# Altium PCB DE-110817.PcbDoc (part 2 of 2)
Units mil, origin at the board's own origin, x right, y up, seen from the top; angles counter-clockwise.
Board outline 3742.01 x 2935 mil, 2 copper layers (Top Layer, Bottom Layer); 204 components, 127 nets, 615 pads, 148 vias.
Unrouted connection lines stored in the file: 4.
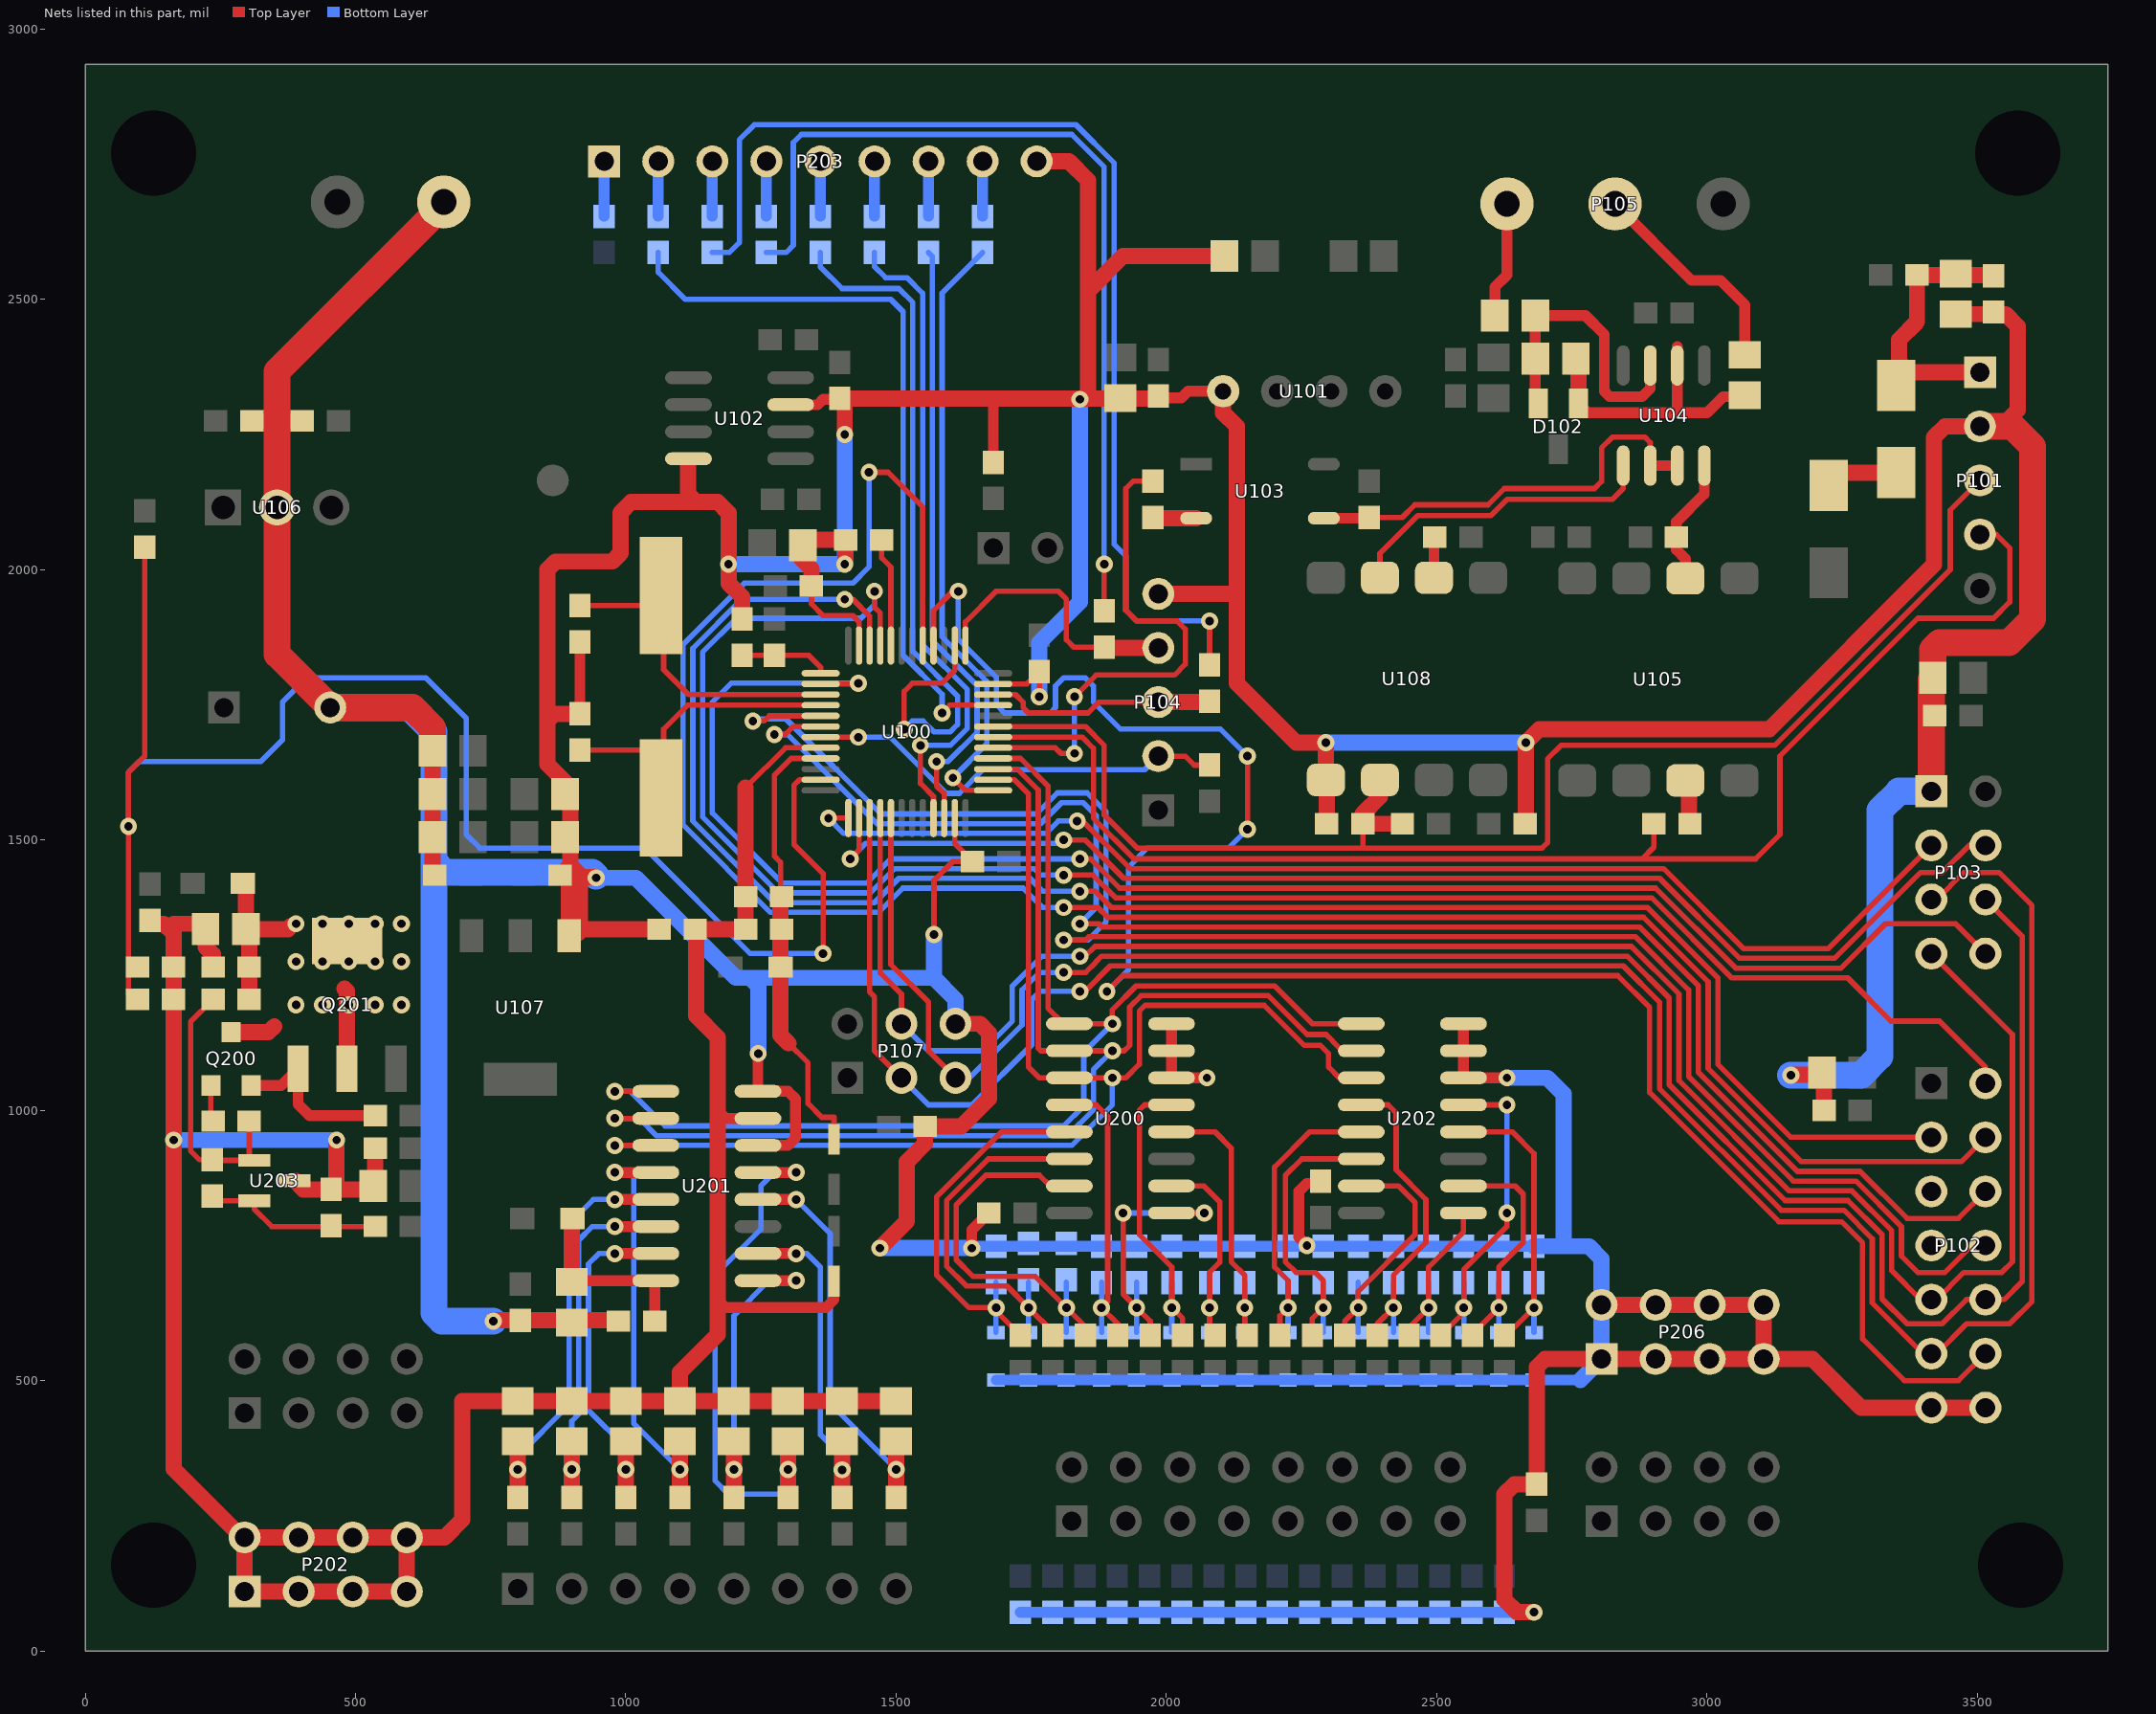
[diagram p2: the nets of this part, all layers, seen from the top]

## Via types
v1: diameter 31.5, hole 15.75, Top Layer to Bottom Layer, 148 vias

## Nets (pads, with @x,y where several pads share a name; then routed paths per layer and width w, separated by ;. In a path a pad name is that pad's centre, name@x,y a point inside that pad or via, vN(x,y) a via of type N, cw(c..) or ccw(c..) an arc to the next point about the centre after c; other vN are vias at no path point) (continued)
LED_1: R248.2 U100.33 | length 1391.9
  Top Layer w10: v1(1585,1735) 1599.21,1749.21 U100.33@1679.45,1749.21
  Bottom Layer w10: R248.2@1060,2586.54 1060,2550 1110,2500 1490,2500 1513,2477 1513,1841.54 1585,1769.54 v1(1585,1735)
LED_2: R104.2 R249.2 | length 2062.9
  Top Layer w10: R104.2@2080,1823.46 v1(2080,1905)
  Bottom Layer w10: R249.2@1160,2586.54 1191.54,2586.54 1210,2605 1210,2795 1238,2823 1832.46,2823 1903,2752.46 1903,2047 1925,2025 1925,1925 1945,1905 v1(2080,1905)
LED_3: R105.2 R250.2 | length 1673.2
  Top Layer w10: R105.2@1885,1923.46 v1(1885,2010)
  Bottom Layer w10: R250.2@1260,2586.54 1296.54,2586.54 1310,2600 1310,2790 1325,2805 1825,2805 1885,2745 v1(1885,2010)
LED_4: R251.2 U100.38 | length 1383.8
  Top Layer w10: v1(1515,1705) 1515,1775 1530,1790 1585,1790 1608.58,1813.58 U100.38@1608.58,1859.45
  Bottom Layer w10: R251.2@1360,2586.54 1360,2560 1400,2520 1505,2520 1531,2494 1531,1849 1613.75,1766.25 1613.75,1713.75 1600,1700 1570,1700 1550,1720 1530,1720 v1(1515,1705)
LED_5: R252.2 U100.21 | length 1218.7
  Top Layer w10: v1(1545,1675) 1545,1604.54 1569.21,1580.33 U100.21@1569.21,1540.55
  Bottom Layer w10: R252.2@1460,2586.54 1460,2560.46 1480.46,2540 1520,2540 1549,2511 1549,1861 1631.75,1778.25 1631.75,1706.29 1600.46,1675 v1(1545,1675)
LED_6: R253.2 U100.22 | length 1132.1
  Top Layer w10: v1(1575,1645) 1575,1600 1588.9,1586.1 U100.22@1588.9,1540.55
  Bottom Layer w10: R253.2@1560,2586.54 1567,2579.54 1567,1868.46 1649.75,1785.71 1649.75,1698.84 1595.91,1645 v1(1575,1645)
LED_7: R254.2 U100.25 | length 1147
  Top Layer w10: v1(1605,1615) 1628.27,1591.73 U100.25@1679.45,1591.73
  Bottom Layer w10: v1(1605,1615) 1667.75,1677.75 1667.75,1793.16 1585,1875.91 1585,2511.54 R254.2@1660,2586.54
MUX_A: U100.26 U200.11 U201.11 U202.11 | length 2465.2
  Top Layer w10: v1(980,935) U201.11@1055.51,935 ; U100.26@1679.45,1611.42 1718.58,1611.42 1745,1585 1745,1080 1765,1060 U200.11@1820.51,1060 v1(1900,1060) 1925,1060 1950,1085 1950,1183.43 1960.57,1194 2181,1194 2255,1120 2285,1120 2300,1105 2300,1080 2320,1060 U202.11@2360.51,1060
  Bottom Layer w10: v1(980,935) 1825,935 1900,1010 v1(1900,1060)
MUX_B: U100.27 U200.10 U201.10 U202.10 | length 2420.4
  Top Layer w10: v1(980,985) U201.10@1055.51,985 ; U100.27@1679.45,1631.1 1724.35,1631.1 1763,1592.46 1763,1115 1768,1110 U200.10@1820.51,1110 v1(1900,1110) 1922,1110 1932,1120 1932,1190.89 1953.11,1212 2188.46,1212 2260.46,1140 2295.46,1140 2308,1127.46 2308,1127 2325,1110 U202.10@2360.51,1110
  Bottom Layer w10: v1(980,985) 1025,985 1057,953 1817.54,953 1865,1000.46 1865,1075 v1(1900,1110)
MUX_C: U100.28 U200.9 U201.9 U202.9 | length 2356.6
  Top Layer w10: v1(980,1035) U201.9@1055.51,1035 ; U100.28@1679.45,1650.79 1730.12,1650.79 1781,1599.91 1781,1189 1810,1160 U200.9@1820.51,1160 v1(1900,1160) 1900,1185.91 1944.09,1230 2200,1230 2270,1160 U202.9@2360.51,1160
  Bottom Layer w10: v1(980,1035) 1008.46,1035 1072.46,971 1810.09,971 1847,1007.91 1847,1107 v1(1900,1160)
NetC100_1: C100.1 C101.1 D100.2 P101.1 R100.1 | length 474.7
  Top Layer w30: P101.1@3505,2365 3374.29,2365 3355,2384.29 3355,2425 3388.46,2458.46 R100.1@3388.46,2545 3528.46,2545 C101.1@3530,2543.46
NetC106_2: C106.2 U100.5 Y100.1 | length 608.6
  Top Layer w10: C106.2@915,1933.46 Y100.1@1056.91,1933.46 ; Y100.1@1070,1972.01 1070,1815 1116.1,1768.9 1360.55,1768.9
NetC107_2: C107.2 U100.6 Y100.2 | length 545.9
  Top Layer w10: C107.2@915,1666.54 Y100.2@1045,1666.54 ; Y100.2@1070,1597.99 1070,1705 1114.21,1749.21 1360.55,1749.21
NetC108_1: C108.1 R108.1 U100.1 | length 165.9
  Top Layer w10: C108.1@1215,1841.54 R108.1@1275,1841.54 1338.46,1841.54 1360.55,1819.45 U100.1@1360.55,1808.27
NetC200_2: C200.2 D200.1 R204.2 U200.13 | length 737.9
  Top Layer w10: R204.2@1730,583.46 1685,628.46 v1(1685,635) 1635,635 1575,695 1575,840 1695,960 U200.13@1820.51,960
  Bottom Layer w10: D200.1@1685,588.9 v1(1685,635) C200.2@1685,681.54
NetC201_2: C201.2 D201.1 R205.2 U200.14 | length 726.6
  Top Layer w10: R205.2@1790,583.46 1790,590 v1(1745,635) 1705,675 1630,675 1593.25,711.75 1593.25,832.8 1670.46,910 U200.14@1820.51,910
  Bottom Layer w10: D201.1@1745,588.9 v1(1745,635) C201.2@1745,681.54
NetC202_2: C202.2 D202.1 R207.2 U200.15 | length 740.9
  Top Layer w10: U200.15@1820.51,860 1785,860 1765,880 1666,880 1611.25,825.25 1611.25,723.75 1642,693 1757,693 v1(1815,635) 1850,600 R207.2@1850,583.46
  Bottom Layer w10: D202.1@1815,588.9 v1(1815,635) C202.2@1815,681.54
NetC203_2: C203.2 D203.1 R209.2 U200.12 | length 594.6
  Top Layer w10: U200.12@1820.51,1010 1870,1010 1891.25,988.75 1891.25,646.25 v1(1880,635) 1910,605 R209.2@1910,583.46
  Bottom Layer w10: D203.1@1880,588.9 v1(1880,635) C203.2@1880,681.54
NetC205_2: C205.2 C207.2 L200.2 U201.16 | length 350.6
  Top Layer w20: C205.2@900,682.4 902.6,685 U201.16@1055.51,685 1053.46,682.95 C207.2@1053.46,610
  Top Layer w30: C205.2@900,682.4 900,798.74 L200.2@901.26,800
NetC208_2: C208.2 R212.1 U201.12 | length 793.5
  Top Layer w20: v1(980,885) U201.12@1055.51,885
  Top Layer w30: R212.1@1100,283.46 v1(1100,335.53) C208.2@1100,387.6
  Bottom Layer w10: v1(980,885) 1005,885 1015,875 1015,420.53 v1(1100,335.53)
NetC209_2: C209.2 R210.1 U201.15 | length 645.6
  Top Layer w20: v1(980,735) U201.15@1055.51,735
  Top Layer w30: R210.1@1000,283.46 v1(1000,335.53) C209.2@1000,387.6
  Bottom Layer w10: v1(980,735) 950,735 931,716 931,445 1000,376 v1(1000,335.53)
NetC210_2: C210.2 R208.1 U201.14 | length 686.9
  Top Layer w20: v1(980,785) U201.14@1055.51,785
  Top Layer w30: R208.1@900,283.46 v1(900,335.53) C210.2@900,387.6
  Bottom Layer w10: v1(900,335.53) 900,425 913,438 913,760 938,785 v1(980,785)
NetC211_2: C211.2 R206.1 U201.13 | length 777.1
  Top Layer w20: v1(980,835) U201.13@1055.51,835
  Top Layer w30: R206.1@800,283.46 v1(800,335.53) C211.2@800,387.6
  Bottom Layer w10: v1(800,335.53) 800,360 895,455 895,790 940,835 v1(980,835)
NetC212_2: C212.2 R216.1 U201.5 | length 1018.2
  Top Layer w20: U201.5@1244.49,885 v1(1315,885)
  Top Layer w30: R216.1@1300,283.46 v1(1300,335.53) C212.2@1300,387.6
  Bottom Layer w10: v1(1300,335.53) 1300,295 1295,290 1190,290 1165,315 1165,695 1250,780 1250,860 1275,885 v1(1315,885)
NetC213_2: C213.2 R218.1 U201.2 | length 621.6
  Top Layer w20: U201.2@1244.49,735 v1(1315,735)
  Top Layer w30: R218.1@1400,283.46 v1(1400,335) C213.2@1400,387.6
  Bottom Layer w10: v1(1315,735) 1335,735 1360,710 1360,400 1400,360 v1(1400,335)
NetC214_2: C214.2 R219.1 U201.4 | length 750.7
  Top Layer w20: U201.4@1244.49,835 v1(1315,835)
  Top Layer w30: R219.1@1500,283.46 v1(1500,335.53) C214.2@1500,387.6
  Bottom Layer w10: v1(1315,835) 1378,772 1378,457.53 v1(1500,335.53)
NetC215_2: C215.2 R214.1 U201.1 | length 601
  Top Layer w20: U201.1@1244.49,685 v1(1315,685)
  Top Layer w30: R214.1@1200,283.46 v1(1200,335.53) C215.2@1200,387.6
  Bottom Layer w10: v1(1200,335.53) 1200,620 1265,685 v1(1315,685)
NetC216_2: C216.2 D206.1 R217.2 U200.4 | length 574.5
  Top Layer w10: U200.4@2009.49,960 2090,960 2120,930 2120,720 2145,695 v1(2145,635) 2145,588.46 R217.2@2150,583.46
  Bottom Layer w10: D206.1@2145,588.9 v1(2145,635) C216.2@2145,681.54
NetC217_2: C217.2 D207.1 R215.2 U200.2 | length 453.2
  Top Layer w10: U200.2@2009.49,860 2069.54,860 2098.75,830.8 2098.75,718.75 2080,700 v1(2080,635) 2080,593.46 R215.2@2090,583.46
  Bottom Layer w10: D207.1@2080,588.9 v1(2080,635) C217.2@2080,681.54
NetC218_2: C218.2 D208.1 R213.2 U200.5 | length 605.9
  Top Layer w10: U200.5@2009.49,1010 1960,1010 1950,1000 1950,770 2010,710 v1(2010,635) 2030,615 R213.2@2030,583.46
  Bottom Layer w10: D208.1@2010,588.9 v1(2010,635) C218.2@2010,681.54
NetC219_2: C219.2 D209.1 R211.2 U200.1 | length 550.4
  Top Layer w10: v1(1920,810) 1920,660 v1(1945,635) 1970,610 R211.2@1970,583.46 ; U200.1@2009.49,810 v1(2070,810)
  Bottom Layer w10: v1(1920,810) v1(2070,810) ; D209.1@1945,588.9 v1(1945,635) C219.2@1945,681.54
NetC221_2: C221.2 D210.1 R232.2 U202.13 | length 608.2
  Top Layer w10: R232.2@2210,583.46 2210,620 v1(2225,635) 2225,685 2200,710 2200,895 2265,960 U202.13@2360.51,960
  Bottom Layer w10: D210.1@2225,588.9 v1(2225,635) C221.2@2225,681.54
NetC222_2: C222.2 D211.1 R233.2 U202.14 | length 599.6
  Top Layer w10: R233.2@2270,583.46 2270,615 v1(2290,635) 2290,685 2275,700 2240,700 2220,720 2220,879.54 2250.46,910 U202.14@2360.51,910
  Bottom Layer w10: D211.1@2290,588.9 v1(2290,635) C222.2@2290,681.54
NetC223_2: C223.2 D212.1 R234.2 U202.15 | length 504.7
  Top Layer w10: R234.2@2330,583.46 2330,610 v1(2355,635) 2355,665 2460,770 2460,829.54 2429.54,860 U202.15@2360.51,860
  Bottom Layer w10: D212.1@2355,588.9 v1(2355,635) C223.2@2355,681.54
NetC224_2: C224.2 D213.1 R235.2 U202.12 | length 634.9
  Top Layer w10: U202.12@2360.51,1010 2410,1010 2425,995 2425,890 2480,835 2480,755 2420,695 v1(2420,635) 2390,605 R235.2@2390,583.46
  Bottom Layer w10: D213.1@2420,588.9 v1(2420,635) C224.2@2420,681.54
NetC226_2: C226.2 C228.2 L201.2 Q200.3 Q201.2 Q201.4 R229.2 | length 539.1
  Top Layer w30: Q200.3@270,1144.21 339.21,1144.21 350,1155 ; L201.2@291.26,1420 297.4,1413.86 C226.2@297.4,1335 ; R229.2@303.46,1205 C228.2@303.46,1265 303.46,1328.94 C226.2@297.4,1335 ; v1@380,1340 375,1335 C226.2@297.4,1335 ; 480,1225 484.33,1220.67 Q201.2@484.33,1076.89
  other v1: 390,1195 438.75,1195 487.5,1195 536.25,1195 585,1195 390,1275 438.75,1275 487.5,1275 536.25,1275 585,1275 390,1345 438.75,1345 487.5,1345 536.25,1345 585,1345
NetC229_1: C229.1 R229.1 R231.2 U203.1 | length 487.7
  Top Layer w10: R229.1@236.54,1205 195,1163.46 195,925 211.54,908.46 C229.1@235,908.46 236.06,907.4 305,907.4 303.46,908.94 R231.2@303.46,980
NetC229_2: C229.2 R240.1 R242.1 U203.2 | length 333.9
  Top Layer w10: C229.2@235,841.54 243.94,832.6 U203.2@312.6,832.6 312.6,817.4 345,785 R240.1@536.54,785
NetC232_2: C232.2 D214.1 R241.2 U202.4 | length 601.1
  Top Layer w10: U202.4@2549.49,960 2640,960 2680,920 v1(2680,635) 2628.46,583.46 R241.2@2625,583.46
  Bottom Layer w10: D214.1@2680,588.9 v1(2680,635) C232.2@2680,681.54
NetC233_2: C233.2 D215.1 R239.2 U202.2 | length 509.7
  Top Layer w10: U202.2@2549.49,860 2645,860 2660,845 2660,755 2615,710 v1(2615,635) 2566.25,586.25 R239.2@2566.25,583.46
  Bottom Layer w10: D215.1@2615,588.9 v1(2615,635) C233.2@2615,681.54
NetC234_2: C234.2 D216.1 R238.2 U202.5 | length 650.4
  Top Layer w10: R238.2@2507.5,583.46 2550,625.96 v1(2550,635) 2550,705 2630,785 v1(2630,810) ; U202.5@2549.49,1010 v1(2630,1010)
  Bottom Layer w10: D216.1@2550,588.9 v1(2550,635) C234.2@2550,681.54 ; v1(2630,810) v1(2630,1010)
NetC235_2: C235.2 D217.1 R236.2 U202.1 | length 360.9
  Top Layer w10: R236.2@2448.75,583.46 2448.75,598.75 v1(2485,635) 2485,710 2549.49,774.49 U202.1@2549.49,810
  Bottom Layer w10: D217.1@2485,588.9 v1(2485,635) C235.2@2485,681.54
NetD100_1: D100.1 D101.2 | length 125
  Top Layer w30: D101.2@3225,2179.29 D100.1@3350,2179.29
NetD102_1: D102.1 R112.1 R113.2 U104.6 | length 546
  Top Layer w20: R113.2@2757.4,2390 2762.4,2390 R113.2@2770,2390 ; D102.1@2762.4,2307.32 2779.72,2290 3000,2290 3030,2320 3067.4,2320 R112.1@3070,2322.6 ; 2945,2290 U104.6@2945,2377.52 U104.6@2945,2412.4
  Top Layer w30: D102.1@2762.4,2307.32 R113.2@2762.4,2390
NetD102_2: D102.2 R113.1 R115.1 U104.7 | length 549.8
  Top Layer w20: D102.2@2687.6,2307.32 2682.4,2312.52 R115.1@2682.4,2470 2775,2470 2810,2435 2810,2330 2820,2320 2880,2320 2895,2335 U104.7@2895,2377.52
NetP105_2: P105.2 R112.2 | length 409.8
  Top Layer w20: P105.2@2830,2676.46 2971.46,2535 3025,2535 3070,2490 R112.2@3070,2397.4
NetP105_3: P105.3 R115.2 | length 215.7
  Top Layer w20: R115.2@2607.6,2470 2607.6,2522.6 2630,2545 P105.3@2630,2676.46
NetP203_1: P203.1 R247.1 | length 101.5
  Bottom Layer w20: R247.1@960,2653.46 P203.1@960,2755
NetP203_2: P203.2 R248.1 | length 101.5
  Bottom Layer w20: R248.1@1060,2653.46 P203.2@1060,2755
NetP203_3: P203.3 R249.1 | length 101.5
  Bottom Layer w20: R249.1@1160,2653.46 P203.3@1160,2755
NetP203_4: P203.4 R250.1 | length 101.5
  Bottom Layer w20: R250.1@1260,2653.46 P203.4@1260,2755
NetP203_5: P203.5 R251.1 | length 101.5
  Bottom Layer w20: R251.1@1360,2653.46 P203.5@1360,2755
NetP203_6: P203.6 R252.1 | length 101.5
  Bottom Layer w20: R252.1@1460,2653.46 P203.6@1460,2755
NetP203_7: P203.7 R253.1 | length 101.5
  Bottom Layer w20: R253.1@1560,2653.46 P203.7@1560,2755
NetP203_8: P203.8 R254.1 | length 101.5
  Bottom Layer w20: R254.1@1660,2653.46 P203.8@1660,2755
NetQ200_1: Q200.1 R231.1 | length 61.9
  Top Layer w10: R231.1@232.6,983.94 Q200.1@232.6,1045.79
NetQ200_2: Q200.2 Q201.1 R237.1 | length 316.5
  Top Layer w20: Q200.2@307.4,1045.79 362.68,1045.79 Q201.1@393.78,1076.89 393.78,1011.22 415,990 R237.1@536.54,990
NetR102_1: R102.1 U100.44 | length 202.6
  Top Layer w10: R102.1@1473.46,2055 1473.46,2021.54 1490.47,2004.53 U100.44@1490.47,1859.45
NetR109_1: R109.1 U103.2 | length 78.5
  Top Layer w30: R109.1@1976.54,2095 U103.2@2055,2095
NetR110_1: R110.1 U103.3 U104.2 U104.3 | length 796.7
  Top Layer w10: R110.1@2375,2096.54 2436.08,2096.54 2459.54,2120 2595,2120 2625,2150 2792,2150 2805,2163 2805,2225 2825,2245 2885,2245 2895,2235 U104.2@2895,2192.48
  Top Layer w20: U103.3@2291.22,2095 R110.1@2373.46,2095 ; U104.2@2895,2192.48 U104.3@2945,2192.48
NetR111_2: R111.2 U104.4 U105.6 | length 225.7
  Top Layer w20: U105.6@2960,1995 2960,2020 2943.46,2036.54 R111.2@2943.46,2060 2943.46,2088.46 2995,2140 U104.4@2995,2192.48
NetR114_2: R114.2 U105.3 | length 82.7
  Top Layer w30: U105.3@2960,1610 2966.54,1603.46 R114.2@2966.54,1530
NetR116_1: R116.1 U108.2 | length 73.5
  Top Layer w20: U108.2@2495,1985 R116.1@2495,2058.46
NetU104_1: U104.1 U108.3 | length 587.2
  Top Layer w10: U108.3@2395,1985 2395,2030 2465,2100 2600,2100 2602,2102 2602.46,2102 2630.46,2130 2825,2130 2845,2150 U104.1@2845,2192.48
NRF24L01_CE: P103.3 U100.13 | length 2275
  Top Layer w10: v1(1375,1540) 1375.55,1540.55 U100.13@1411.73,1540.55 ; v1(1835,1535) 1845,1535 1933,1447 2919.82,1447 3067.82,1299 3224,1299 P103.3@3415,1490
  Bottom Layer w10: v1(1375,1540) 1403,1512 1777,1512 1800,1535 v1(1835,1535)
NRF24L01_CSN: P103.4 U100.14 | length 2374.1
  Top Layer w10: v1(1415,1465) 1431.42,1481.42 U100.14@1431.42,1540.55 ; v1(1810,1500) 1850,1500 1921,1429 2912.37,1429 3060.37,1281 3236,1281 3395,1440 3435,1440 3485,1490 P103.4@3515,1490
  Bottom Layer w10: v1(1415,1465) 1444,1494 1804,1494 v1(1810,1500)
NRF24L01_IRQ: P103.8 U100.2 | length 3127.4
  Top Layer w10: U100.2@1360.55,1788.58 1428.58,1788.58 v1(1430,1790) ; v1(1840,1465) 1859.54,1465 1913.54,1411 2904.91,1411 3052.91,1263 3248,1263 3330,1345 3460,1345 P103.8@3515,1290
  Bottom Layer w10: v1(1430,1790) 1195,1790 1160,1755 1160,1550 1290,1420 1445,1420 1490,1465 v1(1840,1465)
NRF905_AM: P102.7
NRF905_CD: P102.6 U100.4 | length 3008.7
  Top Layer w10: v1(1275,1695) 1295,1695 1309.84,1709.84 1360.55,1709.84 ; v1(1840,1345) 1875,1345 1881,1339 2875.09,1339 2984,1230.09 2984,1070.09 3167.09,887 3283,887 3370,800 3465,800 P102.6@3515,850
  Bottom Layer w10: v1(1275,1695) 1299.54,1695 1464.54,1530 1767,1530 1806,1569 1846,1569 1870,1545 1870,1375 v1(1840,1345)
NRF905_CSN: P102.12 U100.40 | length 3747.9
  Top Layer w10: U100.40@1569.21,1859.45 1569.21,1924.21 v1@1605,1960 ; v1(1890,1220) 1919,1249 2835,1249 2894,1190 2894,1032.81 3132.95,793.86 3248.86,793.86 3287.77,754.95 3287.77,577.23 3365,500 3465,500 P102.12@3515,550 ; v1(2150,1520) v1(2150,1655)
  Bottom Layer w10: v1(1615,1960) 1615,1871.37 1685.75,1800.62 1685.75,1750 1700.75,1735 1785,1735 1795,1745 1795,1785 1810,1800 1850,1800 1865,1785 1865,1755 1915,1705 2100,1705 v1(2150,1655) ; v1(1890,1220) 1930,1260 1930,1450 1965,1485 2115,1485 v1(2150,1520)
NRF905_DR: P102.8 U100.3 | length 3294.5
  Top Layer w10: v1(1235,1720) 1255.95,1720 1265.47,1729.53 1360.55,1729.53 ; v1(1810,1315) 1850.66,1315 1856.66,1321 2867.63,1321 2966,1222.63 2966,1062.63 3159.63,869 3275.54,869 3359.77,784.77 3359.77,730.23 3390,700 3440,700 3490,750 P102.8@3515,750
  Bottom Layer w10: v1(1235,1720) 1238.75,1723.75 1296.25,1723.75 1472,1548 1759.54,1548 1798.54,1587 1853.46,1587 1888,1552.46 1888,1348 1855,1315 v1(1810,1315)
NRF905_PWR_UP: P102.4 U100.41 | length 4111.4
  Top Layer w10: v1(1450,2180) 1485,2180 1549.53,2115.47 U100.41@1549.53,1859.45 ; v1(1810,1375) 1873.18,1375 1891.18,1357 2882.54,1357 3002,1237.54 3002,1077.54 3174.54,905 3470,905 P102.4@3515,950
  Bottom Layer w10: v1(1450,2180) 1450,2005 1420,1975 1219.09,1975 1106,1861.91 1106,1527.63 1267.63,1366 1467.37,1366 1512.37,1411 1735,1411 1771,1375 v1(1810,1375)
NRF905_TRX_CE: P102.3 U100.46 | length 3415.9
  Top Layer w10: v1(1405,1945) 1420,1945 1451.1,1913.9 U100.46@1451.1,1859.45 ; v1(1840,1405) 1868.63,1405 1898.63,1375 2890,1375 3020,1245 3020,1085 3155,950 P102.3@3415,950
  Bottom Layer w10: v1(1405,1945) 1215,1945 1214.77,1945.23 1124,1854.46 1124,1535.09 1275.09,1384 1459.91,1384 1504.91,1429 1747.54,1429 1771.54,1405 v1(1840,1405)
NRF905_TX_EN: P102.2 U100.45 | length 3420.8
  Top Layer w10: v1(1460,1960) 1460,1930.46 1470.79,1919.67 U100.45@1470.79,1859.45 ; v1(1810,1435) 1864.09,1435 1906.09,1393 2897.46,1393 3045.46,1245 3260,1245 3340,1165 3430,1165 3515,1080 P102.2@3515,1050
  Bottom Layer w10: v1(1460,1960) 1460,1935 1435,1910 1205,1910 1142,1847 1142,1542.54 1282.54,1402 1452.46,1402 1497.46,1447 1755,1447 1767,1435 v1(1810,1435)
NRF905_UCLK: P102.5
NRST: P104.2 R103.1 U100.7 | length 797.8
  Top Layer w10: U100.7@1360.55,1690.16 1429.84,1690.16 v1(1430,1690) ; P104.2@1985,1655 2035,1655 2051.54,1638.46 R103.1@2080,1638.46
  Bottom Layer w10: v1(1430,1690) 1489.34,1690 1593.09,1586.25 1616.91,1586.25 1660.66,1630 1960,1630 P104.2@1985,1655
RS485_DIR: R109.2 U100.29 | length 959.8
  Top Layer w10: U100.29@1679.45,1670.47 1794.53,1670.47 1805,1660 v1(1830,1660) ; v1(1830,1765) 1870,1805 2015,1805 2035,1825 2035,1890 2020,1905 1945,1905 1925,1925 1925,2150 1938.46,2163.46 R109.2@1975,2163.46
  Bottom Layer w10: v1(1830,1660) v1(1830,1765)
SPI_1_MISO: P102.9 P103.7 P107.4 U100.16 | length 3659.3
  Top Layer w10: U100.16@1470.79,1540.55 1470.79,1254.21 1510,1215 P107.4@1510,1160 ; v1(1840,1285) 1850,1285 1868,1303 2860.18,1303 2948,1215.18 2948,1055.18 3152.18,851 3268.09,851 3341.77,777.32 3341.77,703.23 3395,650 P102.9@3415,650 3425,650 3475,700 3545,700 3565,720 3565,1140 P103.7@3415,1290
  Bottom Layer w10: P107.4@1510,1160 1560,1110 1660,1110 1715,1165 1715,1230 1770,1285 v1(1840,1285)
SPI_1_MOSI: P102.10 P103.6 P107.5 U100.17 | length 3847.1
  Top Layer w10: U100.17@1490.47,1540.55 1490.47,1269.53 1560,1200 1560,1110 P107.5@1610,1060 ; v1(1810,1255) 1850.66,1255 1868.75,1273.09 1868.75,1273.75 1880,1285 2852.72,1285 2930,1207.72 2930,1047.72 3144.72,833 3260.63,833 3323.77,769.86 3323.77,651.23 3370,605 3435,605 3480,650 P102.10@3515,650 3550,650 3583,683 3583,1322 P103.6@3515,1390
  Bottom Layer w10: P107.5@1610,1060 1635.46,1060 1733,1157.54 1733,1222.54 1765.46,1255 v1(1810,1255)
SPI_1_SCK: P102.11 P103.5 P107.3 U100.15 | length 4237.1
  Top Layer w10: U100.15@1451.1,1540.55 1451.1,1218.9 1460,1210 1460,1110 P107.3@1510,1060 ; v1(1840,1220) 1849.34,1220 1896.34,1267 2845,1267 2912,1200 2912,1040.27 3137.27,815 3253.18,815 3305.77,762.4 3305.77,643.77 3399.54,550 P102.11@3415,550 3425,550 3480,605 3560,605 3601,646 3601,1379 3540,1440 3475,1440 3425,1390 P103.5@3415,1390
  Bottom Layer w10: P107.3@1510,1060 1560,1010 1640,1010 1751,1121 1751,1205 1766,1220 v1(1840,1220)
SWCLK: P104.4 R105.1 U100.37 | length 511.5
  Top Layer w10: U100.37@1628.27,1859.45 1628.27,1903.27 1685,1960 1800,1960 1815,1945 1815,1870 1828.46,1856.54 R105.1@1885,1856.54
  Top Layer w30: R105.1@1885,1856.54 1886.54,1855 P104.4@1985,1855
SWDIO: P104.3 R104.1 U100.34 | length 428.7
  Top Layer w10: U100.34@1679.45,1768.9 1721.1,1768.9 1735,1755 1735,1745 1745,1735 1855,1735 1875,1755 P104.3@1985,1755
  Top Layer w30: P104.3@1985,1755 R104.1@2080,1755
USART_1_RX: P101.3 R117.2 R118.2 U100.31 U108.6 | length 2643.3
  Top Layer w10: U100.31@1679.45,1709.84 1850.16,1709.84 1885,1675 1885,1545.91 1945.91,1485 2695,1485 2705,1495 2705,1650 2730,1675 3125,1675 3450,2000 3450,2110 P101.3@3505,2165 ; 2363.46,1485 R118.2@2363.46,1530
  Top Layer w30: U108.6@2395,1610.98 2395,1580 2363.46,1548.46 R118.2@2363.46,1530 R117.2@2436.54,1530
USART_1_TX: P101.4 R114.1 U100.30 | length 2570.4
  Top Layer w10: U100.30@1679.45,1690.16 1844.39,1690.16 1865,1669.54 1865,1540.46 1940.46,1465 3090,1465 3135,1510 3135,1655 3390,1910 3530,1910 3560,1940 3560,2040 3535,2065 P101.4@3505,2065 ; 2880,1465 2901.54,1486.54 R114.1@2901.54,1530
VBAT: C220.2 R224.1 R225.2 U100.11 | length 3061.9
  Top Layer w10: C220.2@80,1215 v1(80,1525) 80,1625 110,1655 R224.1@110,2041.54 ; U100.11@1360.55,1611.42 1321.42,1611.42 1311,1601 1311,1492 1365,1438 v1(1365,1290)
  Bottom Layer w10: v1(80,1525) 80,1625 100,1645 325,1645 365,1685 365,1755 410,1800 630,1800 705,1725 705,1510 730,1485 1035,1485 1230,1290 v1(1365,1290)
VDDA: C120.2 C121.2 D204.1 L100.2 U100.9 | length 830.8
  Top Layer w10: C121.2@1286.26,1397.2 1286.26,1458.74 1275,1470 1275,1620 1305.79,1650.79 U100.9@1360.55,1650.79 ; 1301.26,1123.74 1337,1088 1337,1012.54 1362.54,987 1385,987 D204.1@1385,946.26
  Top Layer w30: C121.2@1286.26,1397.2 L100.2@1286.26,1265 1286.26,1138.74 1301.26,1123.74
VSS: C100.2 C101.2 C102.2 C103.2 C104.2 C105.2 C106.1 C107.1 C108.2 C109.2 C110.1 C111.1 C112.1 C116.1 C117.1 C118.1 C119.1 C123.2 C124.1 C125.1 C126.1 C127.1 C128.1 C129.1 C130.1 C131.1 C132.1 C133.2 C135.1 C200.1 C201.1 C202.1 C203.1 C204.1 C205.1 C206.1 C207.1 C216.1 C217.1 C218.1 C219.1 C221.1 C222.1 C223.1 C224.1 C225.1 C232.1 C233.1 C234.1 C235.1 C236.1 D200.2 D201.2 D202.2 D203.2 D206.2 D207.2 D208.2 D209.2 D210.2 D211.2 D212.2 D213.2 D214.2 D215.2 D216.2 D217.2 P101.2 P102.13 P102.14 P103.1 P104.5 P106.1 P107.6 P203.9 P206.1 P206.2 P206.3 P206.4 P206.5 P206.6 P206.7 P206.8 R101.1 R102.2 R118.1 R119.1 R200.1 R201.1 R202.1 R203.1 R220.1 R221.1 R222.1 R223.1 R226.1 R227.1 R228.1 R230.1 R243.1 R244.1 R245.1 R246.1 U100.23 U100.35 U100.47 U101.1 U102.4 U102.7 U106.3 U107.1 U108.5 U200.6 U200.7 U200.8 U201.6 U201.8 U202.6 U202.7 U202.8 | length 22233.1
  Top Layer w10: C117.1@1360,1970 C117.1@1343.46,1970 1343.46,1936.54 1365,1915 1420,1915 1431.42,1903.58 U100.47@1431.42,1859.45 ; v1(1570,1325) 1570,1425 1605,1460 C118.1@1641.54,1460 1608.58,1492.95 U100.23@1608.58,1540.55 ; U100.35@1679.45,1788.58 1742.05,1788.58 C119.1@1765,1811.54 v1(1765,1765)
  Top Layer w20: C107.1@915,1733.46 C106.1@915,1866.54 ; U201.6@1244.49,935 1300,935 1314,949 1314,1021 1300,1035 U201.8@1244.49,1035 1244.49,1104.49 v1(1245,1105) ; U102.7@1305,2305 1355,2305 1365,2315 C109.2@1393.98,2315 ; v1(1640,745) 1640,778.46 C204.1@1671.54,810 ; R101.1@1680,2198.46 1680,2311.54 ; C112.1@1985,2317.6 2027.6,2317.6 2040,2330 U101.1@2105,2330 ; U200.8@2009.49,1160 U200.7@2009.49,1110 U200.6@2009.49,1060 v1(2075,1060) ; v1(2260,750) 2245,765 2245,850 2260,865 C225.1@2281.54,865 ; U202.8@2549.49,1160 U202.7@2549.49,1110 U202.6@2549.49,1060 v1(2630,1060)
  Top Layer w30: C132.1@308.46,2275 355,2275 C128.1@401.54,2275 ; C129.1@642.6,1665 C130.1@642.6,1585 C131.1@642.6,1505 642.6,1438.94 C124.1@646.54,1435 ; v1@755,611.54 C206.1@805,611.54 985,611.54 C207.1@986.54,610 ; C126.1@887.4,1585 887.4,1607.6 855,1640 855,1720 ; C125.1@897.4,1438.94 C126.1@897.4,1585 ; U107.1@905,1335 R119.1@1040,1335 ; 905,1431.34 v1@943.66,1431.34 ; C107.1@915,1733.46 868.46,1733.46 855,1720 ; 1115,2190 1115,2140 1130,2125 ; C108.2@1215,1908.46 1215,1950 1190,1975 v1(1190,2010) 1190,2105 1170,2125 1130,2125 ; C116.1@1325,2030.47 1325,2020 1343.46,2001.54 C117.1@1343.46,1970 ; C116.1@1327.4,2045 1337.4,2055 R102.2@1406.54,2055 1406.54,2011.54 v1(1405,2010) ; v1(1405,2250) 1405,2307.05 C109.2@1395.51,2316.54 v1@1855,2316.54 ; v1(1470,745) 1520,795 1520,905 1553.46,938.46 C135.1@1553.46,970 1620.4,970 1672,1021.6 1672,1143 1655,1160 P107.6@1610,1160 ; P203.9@1760,2755 1820,2755 1855,2720 1855,2515 ; P104.5@1985,1955 2130,1955 ; C112.1@1985,2321.54 1980,2316.54 v1@1855,2316.54 ; U101.1@2105,2330 2105,2290 2130,2265 2130,1955 ; C110.1@2107.6,2580 1920,2580 1855,2515 ; U108.5@2295,1610.98 v1(2295,1680) 2240,1680 2130,1790 2130,1955 ; R118.1@2296.54,1530 U108.5@2296.54,1609.45 ; C123.2@2665,1530 v1(2665,1680) 2690,1705 3115.4,1705 3420,2009.6 3420,2245 3440,2265 P101.2@3505,2265 ; v1(2680,71.54) 2648.46,71.54 2625,95 2625,290 2643.46,308.46 C236.1@2685,308.46 2685,525 2700,540 P206.1@2805,540 P206.3@2905,540 P206.5@3005,540 P206.7@3105,540 ; P206.2@2805,640 P206.4@2905,640 P206.6@3005,640 P206.8@3105,640 P206.7@3105,540 ; v1(3155,1065) 3156.06,1066.06 3216.54,1066.06 C103.2@3216.54,1000 ; C100.2@3460,2472.6 3552.4,2472.6 3575,2450 3575,2295 3545,2265 ; P102.14@3515,450 P102.13@3415,450 3285,450 3195,540 P206.7@3105,540 ; 855,1720 855,2000 870,2015 975,2015 990,2030 990,2105 1010,2125 1130,2125 ; v1@1855,2316.54 1855,2515
  Top Layer w50: C129.1@642.6,1665 642.6,1707.4 605,1745 C133.2@453.43,1745 355,1843.43 U106.3@355,2115 355,2275 355,2366.57 P106.1@663.43,2675 ; C125.1@897.4,1438.94 905,1431.34 U107.1@905,1335 ; P103.1@3415,1590 3415,1797.4 C104.2@3417.6,1800 3417.6,1852.6 3430,1865 3558.74,1865 3602,1908.26 3602,2228 3565,2265 3545,2265 P101.2@3505,2265
  Bottom Layer w20: v1(1640,745) 1643.46,748.46 C200.1@1685,748.46 1745,748.46 1815,748.46 C203.1@1880,748.46 C219.1@1945,748.46 C218.1@2010,748.46 C217.1@2080,748.46 C216.1@2145,748.46 C221.1@2225,748.46 C222.1@2290,748.46 C223.1@2355,748.46 C224.1@2420,748.46 C235.1@2485,748.46 C234.1@2550,748.46 C233.1@2615,748.46 C232.1@2680,748.46 ; D200.2@1685,501.1 D202.2@1815,501.1 D203.2@1880,501.1 D209.2@1945,501.1 D208.2@2010,501.1 D207.2@2080,501.1 D206.2@2145,501.1 D210.2@2225,501.1 D211.2@2290,501.1 D212.2@2355,501.1 D213.2@2420,501.1 D217.2@2485,501.1 D216.2@2550,501.1 D215.2@2615,501.1 D214.2@2680,501.1 2766.1,501.1 ; R203.1@1730,71.54 R202.1@1789.67,71.54 R201.1@1849.33,71.54 R200.1@1909,71.54 R223.1@1968.67,71.54 R222.1@2028.33,71.54 R221.1@2088,71.54 R220.1@2147.33,71.54 R230.1@2205,71.54 R228.1@2265,71.54 R227.1@2325,71.54 R226.1@2386.33,71.54 R246.1@2446,71.54 R245.1@2505.67,71.54 R244.1@2565.33,71.54 v1(2680,71.54)
  Bottom Layer w30: v1(945,1430) 1018.74,1430 1203.74,1245 1230,1245 ; v1(1190,2010) v1(1405,2010) v1(1405,2250) ; v1(1245,1105) 1245,1230 1230,1245 ; v1(1470,745) v1(1640,745) ; v1(1570,1325) 1570,1245 ; P107.6@1610,1160 1610,1205 1570,1245 ; v1(1765,1765) 1765,1865 1840,1940 v1(1840,2315) ; v1(2295,1680) v1(2665,1680) ; v1(2630,1060) 2705,1060 2735,1030 2735,748.46 ; C232.1@2680,748.46 2735,748.46 ; 2766.1,501.1 P206.1@2805,540 P206.2@2805,640 2805,725 2781.54,748.46 2735,748.46 ; 1230,1245 1570,1245
  Bottom Layer w50: C133.2@453.43,1745 600,1745 645,1700 645,1460 ; v1(755,610) 660,610 645,625 645,1460 ; v1@945,1433 938,1440 665,1440 645,1460 ; v1(3155,1065) 3285,1065 3320,1100 3320,1555 3355,1590 P103.1@3415,1590
VSSA: C120.1 C121.1 C208.1 C209.1 C210.1 C211.1 C212.1 C213.1 C214.1 C215.1 C220.1 C226.1 C227.1 C228.1 C230.1 C231.1 D205.2 P202.1 P202.2 P202.3 P202.4 P202.5 P202.6 P202.7 P202.8 R119.2 R225.1 R242.2 U100.8 U201.7 U203.3 | length 5769.2
  Top Layer w10: 1221.54,1596.54 1295.47,1670.47 U100.8@1360.55,1670.47
  Top Layer w20: 1170,650 1185,635 1370,635 1385,650 D205.2@1385,683.74 ; 1170,1000 1185,985 U201.7@1244.49,985
  Top Layer w30: C227.1@120,1351.54 126.54,1345 145,1345 163.46,1326.54 ; 163.46,1345 212.6,1345 C226.1@222.6,1335 222.6,1302.4 236.54,1288.46 C228.1@236.54,1265 ; U203.3@387.4,870 403.94,853.46 R242.2@455,853.46 ; v1(465,945) 465,863.46 R242.2@455,853.46 ; C231.1@536.54,930 536.54,863.94 C230.1@532.6,860 526.06,853.46 R242.2@455,853.46 ; 1221.54,1596.54 C121.1@1221.54,1395 ; C121.1@1225,1398.46 C121.1@1221.54,1395 ; C214.1@1500,462.4 C213.1@1400,462.4 C212.1@1300,462.4 C215.1@1200,462.4 C208.1@1100,462.4 ; R225.1@163.46,1265 163.46,1326.54 ; R225.1@163.46,1265 v1(163.46,945) 163.46,336.54 290,210 P202.2@295,210 ; R225.1@163.46,1265 163.46,1326.54 ; P202.2@295,210 P202.1@295,110 P202.3@395,110 P202.5@495,110 P202.7@595,110 P202.8@595,210 ; P202.2@295,210 P202.4@395,210 P202.6@495,210 P202.8@595,210 ; P202.8@595,210 665,210 697.4,242.4 697.4,462.4 C211.1@800,462.4 C210.1@900,462.4 C209.1@1000,462.4 C208.1@1100,462.4 ; C208.1@1100,462.4 1100,515 1170,585 1170,650 1170,1000 1170,1135 1130,1175 1130,1320 1145,1335 C120.1@1221.54,1335 C121.1@1221.54,1395
  Bottom Layer w30: v1(163.46,945) v1(465,945)
pads on no net: FD100.FD U105.1 U105.4 U108.1 U108.4

## Polygon pours and split planes (outlines as drawn)
GND_COM on Top Layer "Top Layer-No Net" (solid, remove dead copper, pour order 0): 2252.5,2935 2252.5,2280 2210,2237.5 2210,1915 2235,1890 3088.75,1890 3122.5,1920 3122.5,2240 3122.5,2260 3162.5,2300 3162.5,2935
VSS on Top Layer "Top Layer-No Net" (solid, remove dead copper, pour order 4): 0,2935 2195,2935 2193.7,2933.7 2193.7,2341.3 2195,2340 2195,2285 2175,2265 2175,1860 2200,1835 3065,1835 3100,1835 3160,1895 3160,2235 3210,2285 3210,2935 3742.01,2935 3742.01,0 0,0 0,2935
GND_COM on Bottom Layer "Top Layer-No Net" (solid, pour order 2): 2250,2915 3165,2915 3165,2300 3125,2260 3125,1925 3090,1890 2240,1890 2235,1890 2210,1915 2210,2240 2250,2280
VSS on Bottom Layer "Top Layer-No Net" (solid, remove dead copper, pour order 6): 0,2935 2195,2935 2195,2285 2170,2260 2165,2255 2165,1865 2195,1835 2295,1835 3100,1835 3160,1895 3160,2235 3210,2285 3210,2935 3742.01,2935 3742.01,0 0,0 0,2935

## Keep-outs
Keep-Out Layer:
  the board outline again, w10

## Other copper
Top Layer:
  rectangle net NetC226_2: 345,1135 620,1365
  rectangle net +3V3: 685,960 925,1260
Bottom Layer:
  rectangle net NetC226_2: 145,1005 610,1510
  rectangle net +3V3: 685,870 935,1265

## Silkscreen, mask and mechanical layers (free items; w line width, h text height)
Top Overlay:
  lines w10: 2860,1155 3035,1155 ; 3125,1825 3310,1825 ; 3165,1565 3185,1565 3260,1490 3345,1490 ; 3180,795 3180,805 3285,910 3345,910 ; 3330,895 3345,910 ; 3330,925 3345,910 ; 3330,1475 3345,1490 ; 3330,1505 3345,1490 ; 2810,770 2855,725 2875,725 3140,725 3180,765 3180,865 3155,890 3120,925 3120,1015 3120,1175 3075,1220 2840,1220 2810,1190 2810,770 ; 3110,1575 3120,1565 3295,1565 3385,1655 3385,1675 3385,1840 3350,1875 3120,1875 3110,1865 3110,1575
  text "POWER: +12V GND" at 185,2865 h34.25
  text "RS485: B    A    GND" at 2350,2860 h38
  text "LED OUTPUT / 0  1  2  3  4  5  6  7 GND" at 935,2815 h35
  text "Vcc" at 3563.11,2350 h20
  text "RADIO / TRANSMITTER / IRT0816" at 95,2340 h39.37
  text "GND" at 3563.11,2260 h20
  text "RX" at 3563.11,2155 h20
  text "TX" at 3563.11,2055 h20
  text "SET" at 3563.11,1950 h20
  text "HC12 / ESP2866" at 3670,1920 h34.25 r90
  text "ICSP" at 1920,1680 h34.25 r90
  text "P103 PINOUT /  / 8 - NRF24L01 IRQ / 7 - SPI MISO / 6 - SPI MOSI / 5 - SPI SCK / 4 - NRF24L01 CSN / 3 - NRF24L01 CE / 2 - +3V3 / 1 - GND" at 3125,1585 h15.75
  text "NRF24L01" at 3670,1293.11 h34.25 r90
  text "I-MEDIA GROUP d.o.o. Sarajevo / Federacija BiH,Bosna i Hercegovina / www.imedia.ba       info@imedia.ba" at 1955,1255 h34.25
  text "SPI EXPANDER" at 1400,1230 h19.68
  text "P102 PINOUT /  / 14 - GND / 13 - GND / 12 - NRF905 CSN / 11 - SPI SCK / 10 - SPI MOSI / 9  - SPI MISO / 8  - NRF905 DR / 7  - NRF905 AM / 6  - NRF905 CD / 5  - NRF905 UCLK / 4  - NRF905 PWR UP / 3  - NRF905 TRX CE / 2  - NRF905 TX EN / 1  - +3V3" at 2865,745 h15.75
  text "NRF905" at 3670,639.98 h34.25 r90
  text "DIN GND" at 2840,440 h34.25
  text "ANALOG +REF" at 265,340 h34.25
  text "DIN +5V" at 2840,140 h34.25
  text "DIGITAL INPUT: / D1 D3 D5 D7 D9 D11 D13 D15 / D0 D2 D4 D6 D8 D10 D12 D14" at 1780,30 h32
  text "A0 A1 A2 A3 A4 A5 A6 A7" at 765,20 h34.25
  text "ANALOG GND" at 265,15 h34.25

## Text inside footprints (layer, text, board x,y; h text height)
C133: Top Overlay "+" at 100.08,1715.47 h20
P102: Top Overlay "2" at 3510,1130 h20 r270; Top Overlay "1" at 3400,1125 h20 r270; Top Overlay "14" at 3495,370 h20 r270; Top Overlay "13" at 3395,370 h20 r270
P103: Top Overlay "2" at 3510,1675 h20 r270; Top Overlay "1" at 3395,1670 h20 r270; Top Overlay "7" at 3395,1230 h20 r270; Top Overlay "8" at 3495,1230 h20 r270
P107: Top Overlay "6" at 1670,1140 h20; Top Overlay "5" at 1670,1040 h20; Top Overlay "2" at 1330,1160 h20; Top Overlay "1" at 1330,1040 h20
P201: Top Overlay "2" at 215,535 h20; Top Overlay "1" at 215,420 h20; Top Overlay "7" at 655,420 h20; Top Overlay "8" at 655,520 h20
P202: Top Overlay "2" at 215,205 h20; Top Overlay "1" at 215,90 h20; Top Overlay "7" at 655,90 h20; Top Overlay "8" at 655,190 h20
P204: Top Overlay "2" at 1745,335 h20; Top Overlay "1" at 1750,230 h20; Top Overlay "15" at 2585,220 h20; Top Overlay "16" at 2585,320 h20
P205: Top Overlay "2" at 2730,330 h20; Top Overlay "1" at 2735,225 h20; Top Overlay "7" at 3165,220 h20; Top Overlay "8" at 3165,320 h20
P206: Top Overlay "2" at 2730,630 h20; Top Overlay "1" at 2735,520 h20; Top Overlay "7" at 3165,520 h20; Top Overlay "8" at 3165,620 h20
U106: Top Overlay "1" at 245.16,1970.31 h20; Top Overlay "2" at 435.32,1970.32 h20; Top Overlay "3" at 335.32,1970.32 h20